# Altium PCB PCB.PcbDoc (part 3 of 6)
Units mm, origin at the board's own origin, x right, y up, seen from the top; angles counter-clockwise.
Board outline 190 x 64 mm, 6 copper layers (SIG 1, GND 1, SIG 2, PWR, GND 2, SIG 3), stack 1.565 mm thick; 489 components, 387 nets, 1828 pads, 1817 vias.
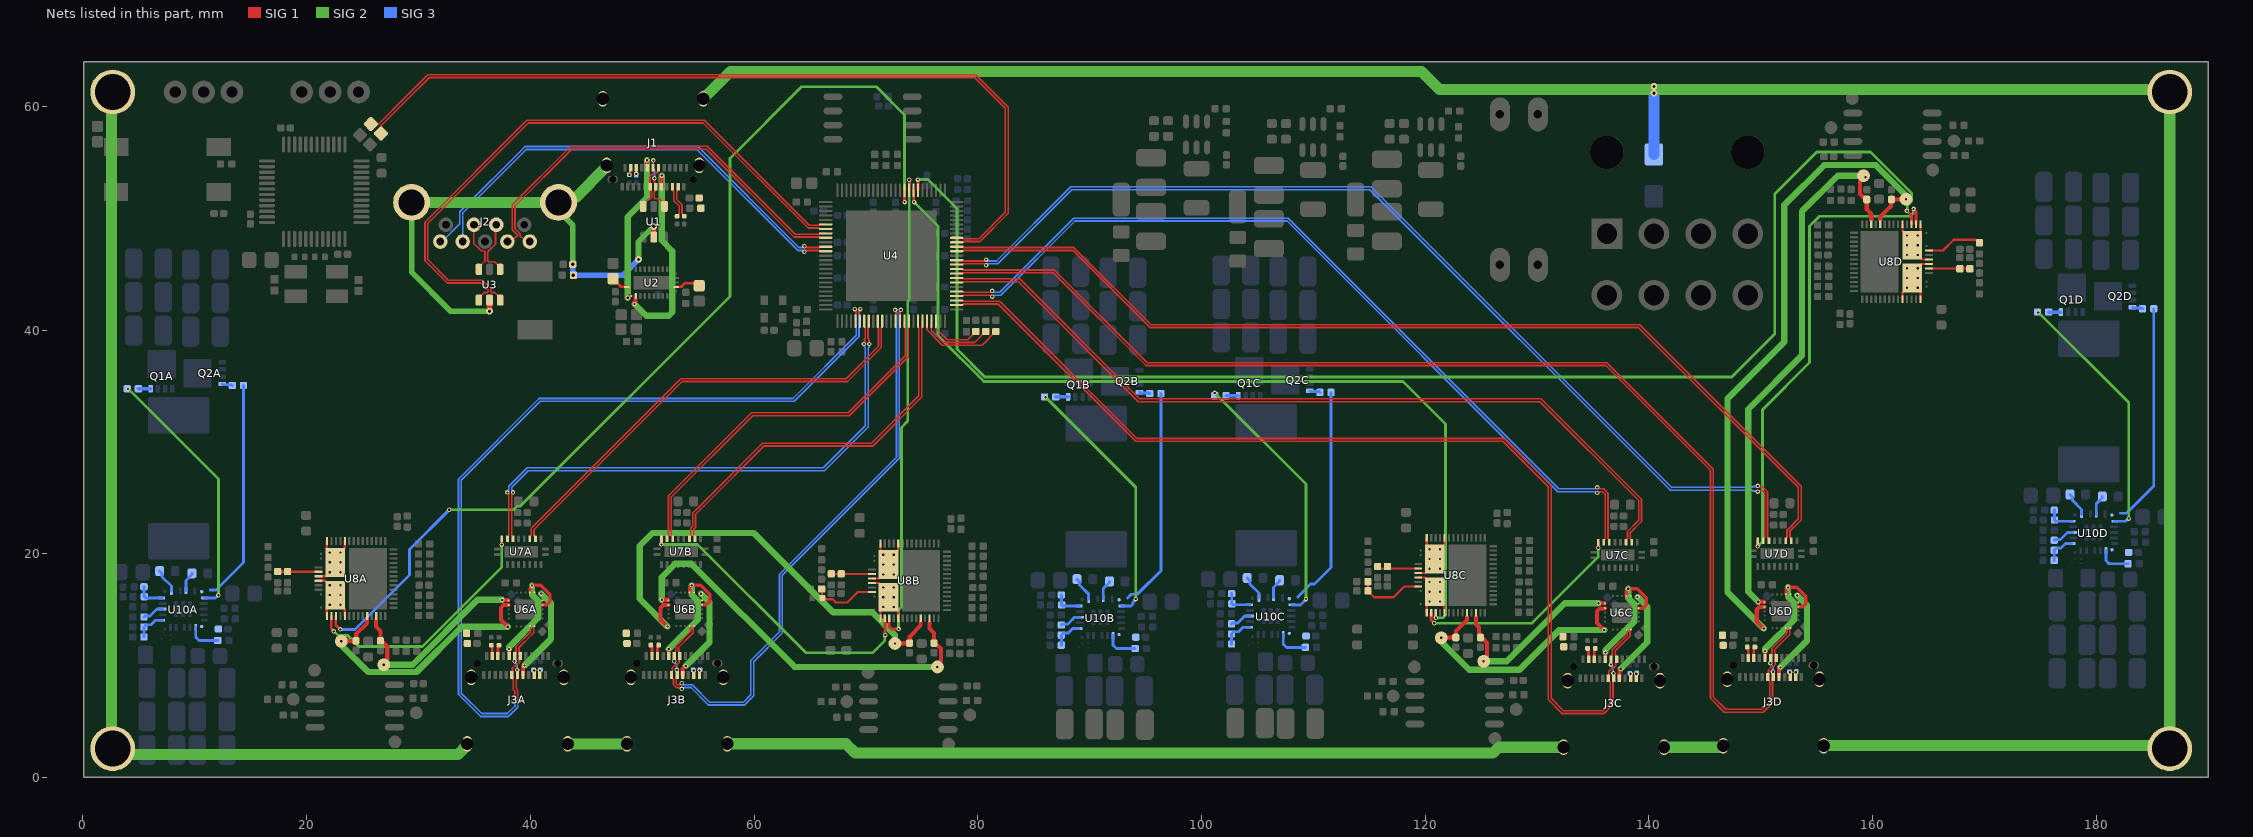
[diagram p7: the nets of this part, all layers, seen from the top]

## Via types
v1: diameter 0.4, hole 0.2, SIG 1 to SIG 3, tented both sides, 1364 vias
v2: diameter 0.6, hole 0.3, SIG 1 to SIG 3, tented both sides, 196 vias
v3: diameter 0.5, hole 0.2, SIG 1 to SIG 3, 130 vias
v4: diameter 0.8, hole 0.45, SIG 1 to SIG 3, tented both sides, 102 vias
v5: diameter 0.5, hole 0.25, SIG 1 to SIG 3, tented both sides, 14 vias
v6: diameter 0.5, hole 0.3, SIG 1 to SIG 3, tented both sides, 5 vias
v7: diameter 0.55, hole 0.3, SIG 1 to SIG 3, tented both sides, 4 vias
v8: diameter 0.55, hole 0.35, SIG 1 to SIG 3, tented both sides, 2 vias

## Nets (pads, with @x,y where several pads share a name; then routed paths per layer and width w, separated by ;. In a path a pad name is that pad's centre, name@x,y a point inside that pad or via, vN(x,y) a via of type N, cw(c..) or ccw(c..) an arc to the next point about the centre after c; other vN are vias at no path point)
AD_N: J2.2 U3.4 | length 5.1
  SIG 1 w0.152: J2.2@36.95,49.435 36.881,49.366 36.881,47.698 36.204,47.021 36.204,46.215 36.293,46.126 36.824,46.126 37.3,45.65 U3.4@37.3,45.45
AD_P: J2.3 U3.6 | length 4.8
  SIG 1 w0.152: J2.3@34.95,49.435 34.95,47.767 35.608,47.109 35.852,47.109 35.95,47.011 35.95,46.2 35.4,45.65 U3.6@35.4,45.45
ADCIN1A: R49A.2 R50A.1 U8A.6 | length 3.7
  SIG 1 w0.203: R49A.2@17.405,18.425 17.428,18.402 21.066,18.402 U8A.6@21.067,18.4
ADCIN1B: R49B.2 R50B.1 U8B.6 | length 3.7
  SIG 1 w0.203: R49B.2@66.905,18.225 66.928,18.202 70.566,18.202 U8B.6@70.567,18.2
ADCIN1C: R49C.2 R50C.1 U8C.6 | length 3.7
  SIG 1 w0.203: R49C.2@115.738,18.725 115.761,18.702 119.398,18.702 U8C.6@119.4,18.7
ADCIN1D: R49D.2 R50D.1 U8D.6 | length 3.7
  SIG 1 w0.203: U8D.6@165.05,45.525 165.052,45.523 168.689,45.523 R49D.2@168.712,45.5
ADCIN2B: R9.1 R10.2 U8B.10 | length 5.8
  SIG 1 w0.2: R10.2@66.045,16.875 66.082,16.837 66.082,16.113 R9.1@66.12,16.075 66.24,15.955 67.036,15.955 67.329,15.662 68.346,15.662 69.284,16.6 U8B.10@70.55,16.6
ADCIN2C: R11.1 R12.2 U8C.10 | length 6
  SIG 1 w0.2: R12.2@114.895,17.525 R11.1@114.895,16.7 115.458,16.137 117.182,16.137 118.145,17.1 U8C.10@119.4,17.1
ADCIN2D: R13.1 U8D.10 | length 5.1
  SIG 1 w0.2: U8D.10@165.05,47.125 166.305,47.125 167.268,48.088 169.237,48.088 R13.1@169.575,47.75
BOOT1A: C60A.1 U10A.22 | length 1.8
  SIG 3 w0.254: U10A.22@9.201,16.722 9.201,17.633 9.751,18.183 C60A.1@9.751,18.272
BOOT1B: C60B.1 U10B.22 | length 1.8
  SIG 3 w0.254: U10B.22@91.231,15.993 91.231,16.903 91.781,17.453 C60B.1@91.781,17.543
BOOT1C: C60C.1 U10C.22 | length 1.8
  SIG 3 w0.254: U10C.22@106.45,16.1 106.45,17.01 107,17.56 C60C.1@107,17.65
BOOT1D: C60D.1 U10D.22 | length 1.8
  SIG 3 w0.254: U10D.22@180.011,23.578 180.011,24.488 180.561,25.038 C60D.1@180.561,25.128
BOOT2A: C61A.1 U10A.20 | length 2.2
  SIG 3 w0.254: C61A.1@6.851,18.472 7.079,18.245 7.079,17.945 7.899,17.124 7.899,16.687 U10A.20@7.901,16.685
BOOT2B: C61B.1 U10B.20 | length 2.2
  SIG 3 w0.254: C61B.1@88.881,17.743 89.109,17.515 89.109,17.215 89.929,16.395 89.929,15.957 U10B.20@89.931,15.955
BOOT2C: C61C.1 U10C.20 | length 2.2
  SIG 3 w0.254: C61C.1@104.1,17.85 104.328,17.622 104.328,17.322 105.148,16.502 105.148,16.064 U10C.20@105.15,16.063
BOOT2D: C61D.1 U10D.20 | length 2.2
  SIG 3 w0.254: C61D.1@177.661,25.328 177.889,25.1 177.889,24.8 178.709,23.98 178.709,23.542 U10D.20@178.711,23.54
C_CC1A: J3A.A5 U6A.4 U6A.7 | length 11.7
  SIG 1 w0.25: v1(38.1,11.495) J3A.A5@38.1,10.875 38.1,10.847 J3A.A5@38.107,10.84
  SIG 1 w0.3: U6A.7@39.972,16.554 39.972,16.975 40.148,17.151 v1(40.148,17.178) ; v1@40.15,17.175 40.169,17.194 40.942,17.194 41.755,16.381 41.755,15.732 41.467,15.444 U6A.4@41.072,15.444
  SIG 2 w0.563: v1(38.1,11.495) 38.1,11.679 40.704,14.282 40.704,15.806 40.148,16.361 v1(40.148,17.178)
C_CC1B: J3B.A5 U6B.4 U6B.7 | length 11.7
  SIG 1 w0.25: J3B.A5@52.375,10.855 J3B.A5@52.382,10.849 ; J3B.A5@52.375,10.883 v1(52.375,11.503)
  SIG 1 w0.3: U6B.7@54.247,16.563 54.247,16.983 54.423,17.159 v1(54.423,17.186) ; v1@54.425,17.183 54.444,17.202 55.217,17.202 56.03,16.389 56.03,15.741 55.742,15.452 U6B.4@55.347,15.452
  SIG 2 w0.563: v1(52.375,11.503) 54.979,14.107 54.979,15.814 54.423,16.37 v1(54.423,17.186)
C_CC1C: J3C.A5 U6C.4 U6C.7 | length 11.7
  SIG 1 w0.25: v1(136.13,11.201) J3C.A5@136.13,10.58 136.13,10.553 J3C.A5@136.137,10.546
  SIG 1 w0.3: U6C.7@138.002,16.26 138.002,16.68 138.179,16.856 v1(138.179,16.883) ; v1@138.18,16.88 138.199,16.899 138.973,16.899 139.786,16.086 139.786,15.438 139.497,15.149 U6C.4@139.102,15.149
  SIG 2 w0.563: v1(136.13,11.201) 136.13,11.384 138.734,13.988 138.734,15.511 138.179,16.067 v1(138.179,16.883)
C_CC1D: J3D.A5 U6D.4 U6D.7 | length 11.7
  SIG 1 w0.25: v1(150.4,11.328) J3D.A5@150.4,10.708 150.4,10.68 J3D.A5@150.407,10.674
  SIG 1 w0.3: U6D.7@152.272,16.388 152.272,16.808 152.448,16.984 v1(152.448,17.011) ; v1@152.45,17.008 152.469,17.027 153.242,17.027 154.055,16.214 154.055,15.566 153.767,15.277 U6D.4@153.372,15.277
  SIG 2 w0.563: v1(150.4,11.328) 150.4,11.512 153.004,14.116 153.004,15.639 152.448,16.195 v1(152.448,17.011)
C_CC2A: J3A.B5 U6A.5 U6A.6 | length 8.7
  SIG 1 w0.367: J3A.B5@39.35,9.175 39.35,9.891 39.475,10.016 v1(39.475,10.025)
  SIG 2 w0.563: v1(39.475,10.025) 41.85,12.4 41.85,15.584 v1(40.979,16.454)
C_CC2B: J3B.B5 U6B.5 U6B.6 | length 8.6
  SIG 1 w0.367: J3B.B5@53.625,9.183 53.625,9.712 53.887,9.974 v1(53.887,9.983)
  SIG 2 w0.563: v1(53.887,9.983) 56.019,12.115 56.019,15.698 v1(55.266,16.451)
C_CC2C: J3C.B5 U6C.5 U6C.6 | length 8.7
  SIG 1 w0.367: J3C.B5@137.38,8.88 137.38,9.597 137.505,9.722 v1(137.505,9.73)
  SIG 2 w0.563: v1(137.505,9.73) 139.88,12.105 139.88,15.289 v1(139.01,16.16)
C_CC2D: J3D.B5 U6D.5 U6D.6 | length 8.7
  SIG 1 w0.367: J3D.B5@151.65,9.008 151.65,9.724 151.775,9.849 v1(151.775,9.858)
  SIG 2 w0.563: v1(151.775,9.858) 154.15,12.233 154.15,15.417 v1(153.279,16.287)
C_USB2_N: J1.A7 J1.B7 U1.6 | length 4.4
  SIG 1 w0.152: U1.6@50.089,51.08 50.089,51.28 50.565,51.756 50.747,51.756 50.836,51.845 50.836,52.387 50.787,52.436 50.787,52.759 50.693,52.853 50.693,53.768 50.931,54.007 51.223,54.007 51.389,54.173 51.389,54.459 J1.B7@51.463,54.533
C_USB2_P: J1.A6 J1.B6 U1.4 | length 5.5
  SIG 1 w0.152: J1.B6@50.963,54.533 50.985,54.555 50.985,55.168 v1(51.006,55.19) ; v1(51.1,53.6) 51.1,53.155 51.213,53.042 J1.A6@51.213,52.833 51.139,52.759 51.139,52.436 51.09,52.387 51.09,51.845 51.179,51.756 51.513,51.756 51.989,51.28 U1.4@51.989,51.08
  SIG 3 w0.152: v1(51.006,55.19) 50.981,55.164 50.981,54.431 51.1,54.312 v1(51.1,53.6)
C_USB3_TX1_N: C4.2 J1.A3 | length 3
  SIG 1 w0.152: J1.A3@52.713,52.833 52.787,52.759 52.787,52.436 52.836,52.387 52.836,51.587 53.312,51.111 53.312,50.413 53.122,50.223 C4.2@53.122,50.207
C_USB3_TX1_P: C3.2 J1.A2 | length 3
  SIG 1 w0.152: J1.A2@53.213,52.833 53.139,52.759 53.139,52.436 53.09,52.387 53.09,51.692 53.427,51.356 53.566,51.216 53.566,50.413 53.757,50.223 C3.2@53.757,50.207
C_USB3_TX1A_N: C35A.1 J3A.A3 | length 1
  SIG 1 w0.254: J3A.A3@37.1,10.875 37.1,11.75 C35A.1@37.2,11.85
C_USB3_TX1A_P: C34A.1 J3A.A2 | length 1
  SIG 1 w0.254: C34A.1@36.5,11.85 36.6,11.75 J3A.A2@36.6,10.875
C_USB3_TX1B_N: C35B.1 J3B.A3 | length 1
  SIG 1 w0.254: J3B.A3@51.375,10.883 51.375,11.758 C35B.1@51.475,11.858
C_USB3_TX1B_P: C34B.1 J3B.A2 | length 1
  SIG 1 w0.254: C34B.1@50.775,11.858 50.875,11.758 J3B.A2@50.875,10.883
C_USB3_TX1C_N: C35C.1 J3C.A3 | length 1
  SIG 1 w0.254: J3C.A3@135.13,10.58 135.13,11.455 C35C.1@135.23,11.555
C_USB3_TX1C_P: C34C.1 J3C.A2 | length 1
  SIG 1 w0.254: C34C.1@134.53,11.555 134.63,11.455 J3C.A2@134.63,10.58
C_USB3_TX1D_N: C35D.1 J3D.A3 | length 1
  SIG 1 w0.254: J3D.A3@149.4,10.708 149.4,11.583 C35D.1@149.5,11.683
C_USB3_TX1D_P: C34D.1 J3D.A2 | length 1
  SIG 1 w0.254: C34D.1@148.8,11.683 148.9,11.583 J3D.A2@148.9,10.708
C_USB3_TX2_N: C6.2 J1.B3 | length 0.6
  SIG 1 w0.152: J1.B3@49.463,54.533 49.464,54.532 49.464,53.982 v1(49.466,53.98)
C_USB3_TX2_P: C5.2 J1.B2 | length 0.7
  SIG 1 w0.152: v1(48.855,53.902) 48.903,53.949 48.903,54.473 J1.B2@48.963,54.533
C_USB3_TX2A_N: C37A.1 J3A.B3
  other v1: 40.345,9.583
C_USB3_TX2A_P: C36A.1 J3A.B2
  other v1: 40.855,9.583
C_USB3_TX2B_N: C37B.1 J3B.B3
  other v1: 54.62,9.591
C_USB3_TX2B_P: C36B.1 J3B.B2
  other v1: 55.13,9.591
C_USB3_TX2C_N: C37C.1 J3C.B3
  other v1: 138.375,9.288
C_USB3_TX2C_P: C36C.1 J3C.B2
  other v1: 138.885,9.288
C_USB3_TX2D_N: C37D.1 J3D.B3
  other v1: 152.645,9.416
C_USB3_TX2D_P: C36D.1 J3D.B2
  other v1: 153.155,9.416
CC1: J1.A5 U2.2 | length 18.2
  SIG 1 w0.367: v1(49.325,42.345) 49.325,42.325 49.3,42.3 49.3,42.49 49.42,42.61 49.42,42.8 ; J1.A5@51.713,52.833 51.713,53.793 51.741,53.821 v1(51.741,53.83)
  SIG 2 w0.563: v1(49.325,42.345) 50.369,41.3 52.37,41.3 52.7,41.63 52.7,47.085 51.741,48.045 v1(51.741,53.83)
CC1A: C49A.1 TP1A.0 U6A.12 U8A.24 | length 24.2
  SIG 1 w0.367: v1(23.1,12.2) 23.115,12.215 24.385,12.215 C49A.1@24.4,12.23 24.429,12.259 24.429,12.829 25.4,13.8 25.4,14.05 ; v1(37.987,13.5) 37.978,13.5 37.668,13.81 37.663,13.81 37.362,14.111 37.362,15.177 37.613,15.428 U6A.12@38.062,15.428
  SIG 2 w0.563: v1(23.1,12.2) 23.1,11.847 25.502,9.445 29.82,9.445 33.875,13.5 v1(37.987,13.5)
CC1B: C49B.1 TP1B.0 U6B.12 U8B.24 | length 42.4
  SIG 1 w0.367: v1(52.262,13.508) 52.253,13.508 51.943,13.818 51.938,13.818 51.637,14.119 51.637,15.185 51.888,15.436 U6B.12@52.337,15.436 ; v1(72.6,12) 72.615,12.015 73.885,12.015 C49B.1@73.9,12.03 73.929,12.059 73.929,12.629 74.9,13.6 74.9,13.85
  SIG 2 w0.563: v1(52.262,13.508) 49.787,15.983 49.787,20.733 50.937,21.883 59.95,21.883 67.058,14.775 70.575,14.775 72.6,12.75 v1(72.6,12)
CC1C: C49C.1 TP1C.0 U6C.12 U8C.24 | length 23.7
  SIG 1 w0.367: v1(121.45,12.5) 121.465,12.515 122.735,12.515 C49C.1@122.75,12.53 122.779,12.559 122.779,13.129 123.75,14.1 123.75,14.35 ; v1(136.018,13.205) 136.009,13.205 135.699,13.515 135.694,13.515 135.393,13.817 135.393,14.882 135.644,15.133 U6C.12@136.092,15.133
  SIG 2 w0.563: v1(121.45,12.5) 121.45,12.147 123.947,9.65 128.45,9.65 132.005,13.205 v1(136.018,13.205)
CC1D: C49D.1 TP1D.0 U6D.12 U8D.24 | length 61.4
  SIG 1 w0.367: v1(150.287,13.333) 150.278,13.333 149.968,13.643 149.963,13.643 149.662,13.944 149.662,15.01 149.913,15.261 U6D.12@150.362,15.261 ; 160.7,49.875 160.7,50.125 161.671,51.096 161.671,51.666 C49D.1@161.7,51.695 161.715,51.71 162.985,51.71 v1(163,51.725)
  SIG 2 w0.563: v1(150.287,13.333) 147.05,16.57 147.05,33.875 152.125,38.95 152.125,51.2 155.7,54.775 160.303,54.775 163,52.078 v1(163,51.725)
CC2: J1.B5 U2.1 | length 13.9
  SIG 1 w0.367: v1(48.7,42.9) 48.709,42.9 48.878,43.069 ; v1(50.425,55.195) 50.431,55.189 50.431,54.565 J1.B5@50.463,54.533
  SIG 2 w0.563: v1(48.7,42.9) 48.7,50.137 50.425,51.862 v1(50.425,55.195)
CC2A: C50A.1 TP2A.0 U6A.11 U8A.26 | length 17.7
  SIG 1 w0.367: 26.2,14.075 26.2,13.521 26.6,13.121 C50A.1@26.6,12.23 ; C50A.1@26.736,12.074 26.864,12.074 27.204,11.734 27.204,10.614 TP2A.0@26.885,10.295 ; v1(37.487,15.895) 37.489,15.897 U6A.11@38.008,15.897
  SIG 2 w0.563: v1(26.885,10.099) 29.474,10.099 35.272,15.897 37.484,15.897 v1(37.487,15.895)
CC2B: C50B.1 TP2B.0 U6B.11 U8B.26 | length 35.7
  SIG 1 w0.367: v1(51.762,15.903) 51.764,15.905 U6B.11@52.283,15.905 ; 75.7,13.85 75.7,13.321 76.1,12.921 C50B.1@76.1,12.03 ; C50B.1@76.236,11.874 76.364,11.874 76.704,11.534 76.704,10.414 TP2B.0@76.385,10.095
  SIG 2 w0.563: v1(51.762,15.903) 51.762,17.929 52.965,19.133 54.392,19.133 63.626,9.899 v1(76.385,9.899)
CC2C: C50C.1 TP2C.0 U6C.11 U8C.26 | length 17.3
  SIG 1 w0.367: 124.55,14.375 124.55,13.685 124.814,13.421 124.814,12.666 C50C.1@124.95,12.53 ; C50C.1@125.086,12.374 125.214,12.374 125.554,12.034 125.554,10.914 125.25,10.61 TP2C.0@125.25,10.4 TP2C.0@125.25,10.4 ; v1(135.517,15.6) 135.52,15.603 U6C.11@136.039,15.603
  SIG 2 w0.563: v1(125.235,10.399) 127.299,10.399 132.5,15.6 v1(135.517,15.6)
CC2D: C50D.1 TP2D.0 U6D.11 U8D.26 | length 49
  SIG 1 w0.367: v1(149.787,15.728) 149.789,15.73 U6D.11@150.308,15.73 ; TP2D.0@159.215,53.63 158.896,53.311 158.896,52.191 159.236,51.851 C50D.1@159.364,51.851 ; C50D.1@159.5,51.695 159.5,50.804 159.9,50.404 159.9,49.875
  SIG 2 w0.563: v1(149.787,15.728) 148.9,16.614 148.9,32.95 153.7,37.75 153.7,50.62 156.906,53.826 159.225,53.826 v1(159.375,53.676)
CDCA: R66A.1 U10A.16 | length 2
  SIG 3 w0.254: R66A.1@5.451,14.372 5.517,14.438 6,14.438 6.632,15.07 7.112,15.07 U10A.16@7.114,15.072
CDCB: R66B.1 U10B.16 | length 2
  SIG 3 w0.254: R66B.1@87.481,13.643 87.547,13.708 88.03,13.708 88.662,14.341 89.142,14.341 U10B.16@89.144,14.343
CDCC: R66C.1 U10C.16 | length 2
  SIG 3 w0.254: R66C.1@102.7,13.75 102.766,13.816 103.249,13.816 103.881,14.448 104.361,14.448 U10C.16@104.363,14.45
CDCD: R66D.1 U10D.16 | length 2
  SIG 3 w0.254: R66D.1@176.261,21.228 176.327,21.293 176.81,21.293 177.442,21.926 177.922,21.926 U10D.16@177.924,21.928
CFG_BC_EN: R33.1 U4.22 | length 6.5
  SIG 1 w0.15: U4.22@75.862,40.818 75.862,39.988 76.935,38.915 79.74,38.915 R33.1@80.725,39.9
CFG_NON_REM: R32.1 U4.21 | length 8
  SIG 1 w0.152: U4.21@75.462,40.818 75.47,40.81 75.47,40.039 76.835,38.674 80.399,38.674 R32.1@81.625,39.9
CFG_STRAP3: R34.1 U4.23 | length 5
  SIG 1 w0.152: U4.23@76.262,40.818 76.27,40.81 76.27,40.164 77.275,39.159 79.116,39.159 79.501,39.544 79.501,39.562 79.827,39.887 R34.1@79.827,39.9
CHASSIS: C7.2 C8.1 C38A.2 C38B.2 C38C.2 C38D.2 D1.2 J1.1 J1.2 J1.3 J1.4 J2.Shell J3A.1 J3A.2 J3A.3 J3A.4 J3B.1 J3B.2 J3B.3 J3B.4 J3C.1 J3C.2 J3C.3 J3C.4 J3D.1 J3D.2 J3D.3 J3D.4 pad.20 R7.1 R14.2 R36A.1 R36B.1 R36C.1 R36D.1 U1.2 U3.2 | length 457.3
  SIG 1 w0.5: v2(36.35,41.7) U3.2@36.35,42.7 ; v2(51.025,49.275) 51.032,49.268 51.032,48.337 U1.2@51.039,48.33
  SIG 2 w0.5: J2.Shell@29.38,51.435 29.38,45.195 32.875,41.7 v2(36.35,41.7) ; J2.Shell@42.52,51.435 42.52,50.677 43.805,49.392 v2(43.805,45.9) ; v2(49.675,46.325) 49.675,47.925 v2(51.025,49.275)
  SIG 2 w1: pad.20@2.673,61.325 pad.20@2.652,61.304 2.551,61.203 2.551,2.696 3.173,2.075 33.52,2.075 34.36,2.915 J3A.3@34.36,3.015 ; J2.Shell@29.38,51.435 J2.Shell@42.52,51.435 42.96,51.875 44.065,51.875 J1.2@46.733,54.543 ; J3A.4@43.34,3.015 43.344,3.019 48.631,3.019 J3B.3@48.635,3.023 ; J1.3@55.553,60.893 55.653,60.993 55.753,60.993 57.89,63.13 119.688,63.13 121.292,61.525 186.192,61.525 186.588,61.129 186.588,2.923 186.551,2.885 155.677,2.885 J3D.4@155.64,2.848 ; J3B.4@57.615,3.023 68.231,3.023 69.054,2.2 126.081,2.2 126.602,2.72 J3C.3@132.39,2.72 ; J3C.4@141.37,2.72 146.56,2.72 146.66,2.82 J3D.3@146.66,2.848
  SIG 3 w0.5: v2(43.805,45.9) 43.805,44.997 43.85,44.952 v2(43.85,44.925) 48.275,44.925 v2(49.675,46.325)
  SIG 3 w1: D1.2@140.462,55.723 140.462,61.587 v2@140.475,61.6
  other v2: 140.475,61.2 140.475,61.8
COMPA: C70A.1 R65A.1 U10A.18 | length 2.5
  SIG 3 w0.254: C70A.1@5.451,17.072 5.466,17.058 5.466,16.187 R65A.1@5.48,16.172 5.578,16.074 7.049,16.074 U10A.18@7.051,16.072
COMPB: C70B.1 R65B.1 U10B.18 | length 2.5
  SIG 3 w0.254: C70B.1@87.481,16.343 87.495,16.329 87.495,15.457 R65B.1@87.51,15.443 87.608,15.345 89.079,15.345 U10B.18@89.081,15.343
COMPC: C70C.1 R65C.1 U10C.18 | length 2.5
  SIG 3 w0.254: C70C.1@102.7,16.45 102.714,16.436 102.714,15.564 R65C.1@102.728,15.55 102.826,15.452 104.298,15.452 U10C.18@104.3,15.45
COMPD: C70D.1 R65D.1 U10D.18 | length 2.5
  SIG 3 w0.254: C70D.1@176.261,23.928 176.276,23.914 176.276,23.042 R65D.1@176.29,23.028 176.388,22.93 177.859,22.93 U10D.18@177.861,22.928
DIRA: U7A.9 U8A.16 | length 22.5
  SIG 1 w0.25: U8A.16@22.2,14.45 22.2,13.331 22.416,13.115 v1(22.416,13.074) ; v1(37.45,20.841) U7A.9@37.45,21.35
  SIG 2 w0.25: v1(22.416,13.074) 22.457,13.074 22.834,12.697 23.674,12.697 24.637,11.734 30.359,11.734 37.45,18.825 v1(37.45,20.841)
DIRB: U7B.9 U8B.16 | length 27
  SIG 1 w0.25: v1(51.725,20.849) U7B.9@51.725,21.358 ; U8B.16@71.7,14.25 71.713,14.237 71.713,12.762 v1(71.725,12.75)
  SIG 2 w0.25: v1(51.725,20.849) 54.951,20.849 64.625,11.175 70.625,11.175 71.696,12.246 71.696,12.721 v1(71.725,12.75)
DIRC: U7C.9 U8C.16 | length 19.5
  SIG 1 w0.25: U8C.16@120.55,14.75 120.546,14.746 120.546,14.115 120.826,13.835 v1(120.826,13.812) ; v1(135.48,20.547) U7C.9@135.48,21.055
  SIG 2 w0.25: v1(120.826,13.812) 129.562,13.812 135.48,19.73 v1(135.48,20.547)
DIRD: U7D.9 U8D.16 | length 42.7
  SIG 1 w0.25: v1(149.75,20.674) U7D.9@149.75,21.183 ; v1(163.684,50.851) 163.684,50.81 163.9,50.594 U8D.16@163.9,49.475
  SIG 2 w0.25: v1(149.75,20.674) 150.175,21.099 150.175,32.9 154.386,37.111 154.386,49.323 155.263,50.2 163.375,50.2 163.525,50.35 163.525,50.355 163.655,50.485 163.655,50.822 v1(163.684,50.851)
DITHA: C71A.1 U10A.7
DITHB: C71B.1 U10B.7
DITHC: C71C.1 U10C.7
DITHD: C71D.1 U10D.7
DP1_USB2_N: J3A.A7 J3A.B7 U4.6 U6A.20 | length 77.3
  SIG 1 w0.152: 38.623,7.065 38.623,7.714 38.473,7.864 38.473,8.729 38.424,8.778 38.424,9.101 J3A.B7@38.35,9.175 38.409,9.234 38.409,9.797 38.636,10.024 38.761,10.024 39.026,10.289 39.026,10.801 J3A.A7@39.1,10.875 39.026,10.949 39.026,11.272 38.977,11.321 38.977,11.627 40.15,12.8 40.299,12.949 40.299,13.464 40.372,13.537 U6A.20@40.372,13.544 ; 69.389,41.71 69.389,41.41 69.462,41.337 U4.6@69.462,40.818
  SIG 3 w0.152: v1(38.5,6.875) 38.5,6.808 38.623,6.685 38.623,6.403 37.949,5.73 35.645,5.73 33.825,7.55 33.825,26.587 40.884,33.646 63.596,33.646 63.745,33.795 69.24,39.29 69.389,39.439 69.389,41.71 69.512,41.833 v1(69.512,41.9)
DP1_USB2_P: J3A.A6 J3A.B6 U4.5 U6A.19 | length 77.3
  SIG 1 w0.152: J3A.A6@38.6,10.875 38.674,10.949 38.674,11.272 38.723,11.321 38.723,11.732 40.045,13.054 40.045,13.464 39.972,13.537 U6A.19@39.972,13.544 ; v1(38.812,9.625) 38.831,9.606 J3A.B6@38.831,9.248 ; J3A.B6@38.85,9.175 38.776,9.101 38.776,8.778 38.727,8.729 38.727,7.97 38.877,7.82 38.877,7.065 ; U4.5@69.062,40.818 69.062,41.337 69.135,41.41 69.135,41.71
  SIG 3 w0.152: v1(38.587,10.4) 38.587,10.333 38.812,10.108 v1(38.812,9.625) ; v1(39,6.875) 39,6.808 38.877,6.685 38.877,6.298 38.055,5.476 35.54,5.476 33.571,7.445 33.571,26.692 40.779,33.9 63.491,33.9 69.135,39.544 69.135,41.71 69.012,41.833 v1(69.012,41.9)
DP1_USB3_RX_N: U4.10 U7A.4 | length 41.1
  SIG 1 w0.152: U7A.4@39.95,21.35 39.95,21.525 40.073,21.648 40.073,22.273 40.222,22.422 53.326,35.526 53.475,35.675 68.25,35.675 71.135,38.56 71.135,40.225 71.062,40.298 U4.10@71.062,40.818
DP1_USB3_RX_P: U4.11 U7A.3 | length 41.1
  SIG 1 w0.152: U7A.3@40.45,21.35 40.45,21.525 40.327,21.648 40.327,22.168 53.58,35.421 68.355,35.421 71.389,38.455 71.389,40.225 71.462,40.298 U4.11@71.462,40.818
DP1_USB3_TX_N: U4.7 U7A.8 | length 48.5
  SIG 1 w0.152: U7A.8@37.95,21.35 37.95,21.525 38.073,21.648 38.073,25.377 v1(37.95,25.5) ; v1(69.825,38.775) 69.872,38.822 69.872,39.194 69.935,39.257 69.935,40.225 69.862,40.298 U4.7@69.862,40.818
  SIG 3 w0.152: v1(37.95,25.5) 37.95,25.567 38.073,25.69 38.073,26.059 39.718,27.704 66.194,27.704 69.948,31.457 69.948,38.41 69.872,38.486 69.872,38.728 v1(69.825,38.775)
DP1_USB3_TX_P: U4.8 U7A.7 | length 48.5
  SIG 1 w0.152: U7A.7@38.45,21.35 38.45,21.525 38.327,21.648 38.327,25.377 v1(38.45,25.5) ; U4.8@70.262,40.818 70.262,40.298 70.189,40.225 70.189,39.28 70.278,39.191 70.278,38.822 v1(70.325,38.775)
  SIG 3 w0.152: v1(38.45,25.5) 38.45,25.567 38.327,25.69 38.327,25.954 39.823,27.45 66.3,27.45 70.202,31.352 70.202,38.41 70.278,38.486 70.278,38.728 v1(70.325,38.775)
DP2_USB2_N: J3B.A7 J3B.B7 U4.15 U6B.20 | length 55.4
  SIG 1 w0.152: 53.347,8.056 53.037,8.056 52.799,8.294 52.799,8.809 52.625,8.983 J3B.B7@52.625,9.183 52.684,9.242 52.684,9.805 52.911,10.032 53.036,10.032 53.301,10.297 53.301,10.809 J3B.A7@53.375,10.883 53.301,10.957 53.301,11.28 53.252,11.329 53.252,11.635 54.425,12.808 54.574,12.957 54.574,13.472 54.647,13.545 U6B.20@54.647,13.552 ; U4.15@73.062,40.818 73.062,41.775 v1(73.112,41.825)
  SIG 3 w0.152: v1(53.537,7.933) 53.604,7.933 53.727,8.056 54.36,8.056 55.916,6.5 59.159,6.5 59.308,6.649 59.975,7.316 59.975,10.375 62.529,12.929 62.529,18.086 72.989,28.546 72.989,41.635 73.112,41.758 v1(73.112,41.825)
DP2_USB2_P: J3B.A6 J3B.B6 U4.14 U6B.19 | length 53.7
  SIG 1 w0.152: J3B.A6@52.875,10.883 52.949,10.957 52.949,11.28 52.998,11.329 52.998,11.74 54.32,13.062 54.32,13.472 54.247,13.545 U6B.19@54.247,13.552 ; v1(53.087,9.633) 53.106,9.614 J3B.B6@53.106,9.257 ; J3B.B6@53.125,9.183 53.053,9.111 53.053,8.4 53.142,8.31 53.347,8.31 ; v1(72.612,41.825) 72.662,41.775 U4.14@72.662,40.818
  SIG 3 w0.152: v1(52.862,10.408) 52.862,10.341 53.087,10.116 v1(53.087,9.633) ; v1(53.537,8.433) 53.604,8.433 53.727,8.31 54.465,8.31 56.021,6.754 59.054,6.754 59.721,7.421 59.721,10.48 62.275,13.034 62.275,18.191 72.735,28.651 72.735,41.635 72.612,41.758 v1(72.612,41.825)
DP2_USB3_RX_N: U4.19 U7B.4 | length 33.7
  SIG 1 w0.152: U7B.4@54.225,21.358 54.225,21.533 54.348,21.656 54.348,22.31 54.512,22.473 54.512,23.642 54.66,23.791 54.877,24.008 55.418,24.549 60.62,29.751 60.769,29.9 70.5,29.9 74.735,34.135 74.735,40.225 74.662,40.298 U4.19@74.662,40.818
DP2_USB3_RX_P: U4.20 U7B.3 | length 33.7
  SIG 1 w0.152: U7B.3@54.725,21.358 54.725,21.533 54.602,21.656 54.602,22.204 54.766,22.368 54.766,23.537 55.131,23.902 55.523,24.295 60.874,29.646 70.605,29.646 74.989,34.03 74.989,40.225 75.062,40.298 U4.20@75.062,40.818
DP2_USB3_TX_N: U4.16 U7B.8 | length 33.4
  SIG 1 w0.152: U7B.8@52.225,21.358 52.225,21.533 52.348,21.656 52.348,25.202 59.771,32.625 68.425,32.625 73.535,37.735 73.535,40.225 73.462,40.298 U4.16@73.462,40.818
DP2_USB3_TX_P: U4.17 U7B.7 | length 33.4
  SIG 1 w0.152: U7B.7@52.725,21.358 52.725,21.533 52.602,21.656 52.602,25.097 59.876,32.371 68.53,32.371 73.789,37.63 73.789,40.225 73.862,40.298 U4.17@73.862,40.818
DP3_USB2_N: J3C.A7 J3C.B7 U4.28 U6C.20 | length 92.7
  SIG 1 w0.152: U4.28@78.113,42.669 78.633,42.669 78.706,42.596 81.954,42.596 82.103,42.447 94.225,30.325 127.059,30.325 127.208,30.176 131.126,26.258 131.275,26.109 131.275,7.086 132.38,5.98 135.88,5.98 136.554,6.654 136.554,8.507 136.38,8.68 J3C.B7@136.38,8.88 136.439,8.939 136.439,9.502 136.666,9.729 136.791,9.729 137.057,9.995 137.057,10.507 J3C.A7@137.13,10.58 137.057,10.654 137.057,10.978 137.007,11.027 137.007,11.332 138.181,12.506 138.329,12.654 138.329,13.169 138.402,13.242 U6C.20@138.402,13.249
DP3_USB2_P: J3C.A6 J3C.B6 U4.27 U6C.19 | length 92.2
  SIG 1 w0.152: U4.27@78.113,42.269 78.633,42.269 78.706,42.342 81.849,42.342 94.12,30.071 126.954,30.071 131.021,26.004 131.021,7.315 ; 131.021,7.272 131.021,6.981 132.275,5.726 135.986,5.726 136.808,6.549 136.808,7.658 136.808,8.808 J3C.B6@136.88,8.88 ; J3C.A6@136.63,10.58 136.704,10.654 136.704,10.978 136.753,11.027 136.753,11.438 138.075,12.76 138.075,13.169 138.002,13.242 U6C.19@138.002,13.249 ; v1(136.843,9.33) 136.861,9.312 J3C.B6@136.861,8.954
  SIG 3 w0.152: v1(136.618,10.105) 136.618,10.038 136.843,9.813 v1(136.843,9.33)
DP3_USB3_RX_N: U4.32 U7C.4 | length 73.3
  SIG 1 w0.152: U4.32@78.113,44.269 78.633,44.269 78.706,44.342 83.649,44.342 94.37,33.621 130.27,33.621 139.105,24.785 139.105,23.009 138.103,22.007 138.103,21.353 137.98,21.23 U7C.4@137.98,21.055
DP3_USB3_RX_P: U4.33 U7C.3 | length 73.7
  SIG 1 w0.152: U4.33@78.113,44.669 78.633,44.669 78.706,44.596 83.754,44.596 94.475,33.875 130.375,33.875 139.359,24.891 139.359,22.904 138.357,21.902 138.357,21.353 138.48,21.23 U7C.3@138.48,21.055
DP3_USB3_TX_N: U4.29 U7C.8 | length 75.2
  SIG 1 w0.152: U4.29@78.113,43.069 78.633,43.069 78.706,43.142 81.177,43.142 v1(81.3,43.019) ; v1@135.55,25.575 135.861,25.575 136.103,25.332 136.103,21.353 135.98,21.23 U7C.8@135.98,21.055
  SIG 3 w0.152: v1(81.3,43.019) 81.367,43.019 81.49,43.142 82.067,43.142 88.696,49.771 107.67,49.771 131.866,25.575 135.21,25.575 135.333,25.452 v1(135.4,25.452)
DP3_USB3_TX_P: U4.30 U7C.7 | length 75.6
  SIG 1 w0.152: U4.30@78.113,43.469 78.633,43.469 78.706,43.396 81.177,43.396 v1(81.3,43.519) ; v1@135.55,25.829 135.966,25.829 136.357,25.438 136.357,21.353 136.48,21.23 U7C.7@136.48,21.055
  SIG 3 w0.152: v1(81.3,43.519) 81.367,43.519 81.49,43.396 81.962,43.396 88.591,50.025 107.775,50.025 131.971,25.829 135.21,25.829 135.333,25.952 v1(135.4,25.952)
DP4_USB2_N: J3D.A7 J3D.B7 U4.35 U6D.20 | length 108.9
  SIG 1 w0.152: U4.35@78.113,45.469 78.633,45.469 78.706,45.396 86.854,45.396 95.15,37.1 136.259,37.1 145.775,27.584 145.775,7.209 146.876,6.108 150.15,6.108 150.824,6.782 150.824,8.634 150.65,8.808 J3D.B7@150.65,9.008 150.709,9.067 150.709,9.63 150.936,9.857 151.061,9.857 151.326,10.122 151.326,10.634 J3D.A7@151.4,10.708 151.326,10.782 151.326,11.105 151.277,11.154 151.277,11.46 152.45,12.633 152.599,12.782 152.599,13.297 152.672,13.37 U6D.20@152.672,13.377
DP4_USB2_P: J3D.A6 J3D.B6 U4.34 U6D.19 | length 108.5
  SIG 1 w0.152: U4.34@78.113,45.069 78.633,45.069 78.706,45.142 86.749,45.142 95.045,36.846 136.154,36.846 145.521,27.479 145.521,7.104 146.771,5.854 150.255,5.854 151.078,6.677 151.078,8.936 J3D.B6@151.15,9.008 ; J3D.A6@150.9,10.708 150.974,10.782 150.974,11.105 151.023,11.154 151.023,11.565 152.345,12.887 152.345,13.297 152.272,13.37 U6D.19@152.272,13.377 ; v1(151.112,9.458) 151.131,9.439 J3D.B6@151.131,9.082
  SIG 3 w0.152: v1(150.887,10.233) 150.887,10.166 151.112,9.941 v1(151.112,9.458)
DP4_USB3_RX_N: U4.39 U7D.4 | length 89.3
  SIG 1 w0.152: U4.39@78.113,47.069 78.633,47.069 78.706,47.142 88.499,47.142 95.246,40.395 95.395,40.246 139.079,40.246 153.375,25.95 153.375,23.137 152.373,22.135 152.373,21.481 152.25,21.358 U7D.4@152.25,21.183
DP4_USB3_RX_P: U4.40 U7D.3 | length 89.7
  SIG 1 w0.152: U4.40@78.113,47.469 78.633,47.469 78.706,47.396 88.604,47.396 95.5,40.5 139.184,40.5 153.629,26.055 153.629,25.018 153.629,24.913 153.629,23.031 152.627,22.029 152.627,21.481 152.75,21.358 U7D.3@152.75,21.183
DP4_USB3_TX_N: U4.36 U7D.8 | length 90.6
  SIG 1 w0.152: U4.36@78.113,45.869 78.633,45.869 78.714,45.95 80.583,45.95 ; v1(149.75,25.58) 149.797,25.627 150.055,25.627 150.13,25.703 150.373,25.46 150.373,21.481 150.25,21.358 U7D.8@150.25,21.183
  SIG 3 w0.152: v1(80.75,45.825) 80.817,45.825 80.94,45.948 81.794,45.948 88.417,52.571 115.07,52.571 141.864,25.777 141.938,25.703 149.255,25.703 149.331,25.627 149.703,25.627 v1(149.75,25.58)
DP4_USB3_TX_P: U4.37 U7D.7 | length 91.2
  SIG 1 w0.152: U4.37@78.113,46.269 78.633,46.269 78.698,46.204 80.629,46.204 v1(80.75,46.325) ; v1(149.75,26.08) 149.797,26.032 150.16,26.032 150.627,25.565 150.627,21.481 150.75,21.358 U7D.7@150.75,21.183
  SIG 3 w0.152: v1(80.75,46.325) 80.817,46.325 80.94,46.202 81.689,46.202 88.312,52.825 115.175,52.825 142.043,25.957 149.255,25.957 149.331,26.032 149.703,26.032 v1(149.75,26.08)
DP5_USB2_N: U3.1 U4.81 | length 55.1
  SIG 1 w0.152: U3.1@35.4,42.7 35.4,42.9 35.876,43.376 36.145,43.376 36.235,43.465 36.235,43.592 35.601,44.225 32.57,44.225 30.575,46.22 30.575,49.659 39.559,58.643 39.708,58.792 55.549,58.792 64.945,49.396 65.818,49.396 65.891,49.469 U4.81@66.411,49.469
DP5_USB2_P: U3.3 U4.82 | length 54.7
  SIG 1 w0.152: U3.3@37.3,42.7 37.3,42.9 36.824,43.376 36.578,43.376 36.489,43.465 36.489,43.697 35.707,44.479 32.675,44.479 30.829,46.325 30.829,49.554 39.813,58.538 55.444,58.538 64.84,49.142 65.818,49.142 65.891,49.069 U4.82@66.411,49.069
DP5_USB3_RX_N: J2.5 U4.86 | length 42.5
  SIG 1 w0.152: v1(64.504,47.519) 64.627,47.396 65.818,47.396 65.891,47.469 U4.86@66.411,47.469
  SIG 3 w0.152: J2.5@31.95,47.935 32.118,47.935 33.696,49.513 33.696,50.598 39.523,56.425 55,56.425 64.029,47.396 64.314,47.396 64.437,47.519 v1(64.504,47.519)
DP5_USB3_RX_P: J2.6 U4.87 | length 41.1
  SIG 1 w0.152: v1(64.504,47.019) 64.627,47.142 65.818,47.142 65.891,47.069 U4.87@66.411,47.069
  SIG 3 w0.152: J2.6@33.95,47.935 33.95,50.25 ; 33.95,50.355 33.95,50.492 39.629,56.171 54.895,56.171 63.924,47.142 64.314,47.142 64.437,47.019 v1(64.504,47.019)
DP5_USB3_TX_N: J2.8 U4.83 | length 37.6
  SIG 1 w0.152: J2.8@37.95,47.935 38.261,47.935 38.644,48.319 38.734,48.319 38.823,48.408 38.823,48.534 38.37,48.988 38.37,51.22 38.519,51.369 43.451,56.301 43.6,56.45 55.826,56.45 63.68,48.596 65.818,48.596 65.891,48.669 U4.83@66.411,48.669
DP5_USB3_TX_P: J2.9 U4.84 | length 37.1
  SIG 1 w0.152: J2.9@39.95,47.935 39.639,47.935 39.256,48.319 39.166,48.319 39.077,48.408 39.077,48.64 38.624,49.093 38.624,51.115 43.705,56.196 55.721,56.196 63.575,48.342 65.818,48.342 65.891,48.269 U4.84@66.411,48.269
DP6_USB2_N: R79.1 U4.41 | length 75.2
  SIG 1 w0.152: R79.1@25.734,58.434 25.749,58.449 26.445,58.449 28.917,60.922 30.697,62.701 30.845,62.85 79.83,62.85 82.729,59.951 82.729,50.454 82.58,50.305 80.366,48.091 80.217,47.942 78.706,47.942 78.633,47.869 U4.41@78.113,47.869
DP6_USB2_P: R80.1 U4.42 | length 74.1
  SIG 1 w0.152: R80.1@26.634,57.584 26.649,57.599 26.649,58.295 29.023,60.668 30.951,62.596 79.725,62.596 82.475,59.846 82.475,50.559 80.112,48.196 78.706,48.196 78.633,48.269 U4.42@78.113,48.269
DR1HA: R57A.2 U10A.2 | length 23.1
  SIG 2 w0.25: v1@4.1,34.7 12.109,26.691 v1(12.109,16.305)
  SIG 3 w0.254: U10A.2@10.851,16.072 11.837,16.072 12.069,16.305 v1(12.109,16.305)
  other v1: 4.025,34.745
DR1HB: R57B.2 U10B.2 | length 23
  SIG 2 w0.25: v1@86.13,33.97 94.138,25.962 v1(94.138,15.965)
  SIG 3 w0.254: U10B.2@92.881,15.343 93.71,15.343 93.889,15.522 93.889,15.676 94.138,15.925 v1(94.138,15.965)
  other v1: 86.055,34.015
DR1HC: R57C.2 U10C.2 | length 23.3
  SIG 2 w0.25: v1(101.2,34.4) 109.357,26.243 v1(109.357,15.965)
  SIG 3 w0.254: U10C.2@108.1,15.45 108.856,15.45 109.357,15.951 v1(109.357,15.965)
DR1HD: R57D.2 U10D.2 | length 23.1
  SIG 2 w0.25: v1@174.91,41.555 182.919,33.547 v1(182.919,23.16)
  SIG 3 w0.254: U10D.2@181.661,22.928 182.647,22.928 182.879,23.16 v1(182.919,23.16)
  other v1: 174.835,41.6
DR1HGA: Q1A.4 R57A.1 | length 1.1
  SIG 3 w0.305: R57A.1@4.951,34.772 Q1A.4@6.051,34.772
DR1HGB: Q1B.4 R57B.1 | length 1.1
  SIG 3 w0.305: R57B.1@86.981,34.043 Q1B.4@88.081,34.043
DR1HGC: Q1C.4 R57C.1 | length 1.1
  SIG 3 w0.305: R57C.1@102.2,34.15 Q1C.4@103.3,34.15
DR1HGD: Q1D.4 R57D.1 | length 1.1
  SIG 3 w0.305: R57D.1@175.761,41.628 Q1D.4@176.861,41.628
DR1LA: R58A.2 U10A.1 | length 19.8
  SIG 3 w0.254: 11.372,16.787 11.905,16.787 14.351,19.233 R58A.2@14.351,35.072
DR1LB: R58B.2 U10B.1 | length 19.8
  SIG 3 w0.254: 93.402,16.058 93.736,16.392 94.269,16.392 96.381,18.504 R58B.2@96.381,34.343
DR1LC: R58C.2 U10C.1 | length 19.7
  SIG 3 w0.254: 108.621,16.165 109.762,17.306 110.109,17.306 111.6,18.797 R58C.2@111.6,34.45
DR1LD: R58D.2 U10D.1 | length 19.8
  SIG 3 w0.254: 182.182,23.643 182.715,23.643 185.161,26.089 R58D.2@185.161,41.928
DR1LGA: Q2A.4 R58A.1 | length 1
  SIG 3 w0.254: Q2A.4@12.446,35.197 12.509,35.135 13.289,35.135 R58A.1@13.351,35.072
DR1LGB: Q2B.4 R58B.1 | length 1
  SIG 3 w0.254: Q2B.4@94.476,34.468 94.539,34.405 95.319,34.405 R58B.1@95.381,34.343
DR1LGC: Q2C.4 R58C.1 | length 1
  SIG 3 w0.254: Q2C.4@109.695,34.575 109.758,34.512 110.538,34.512 R58C.1@110.6,34.45
DR1LGD: Q2D.4 R58D.1 | length 1
  SIG 3 w0.254: Q2D.4@183.256,42.053 183.319,41.99 184.099,41.99 R58D.1@184.161,41.928
DRAIN1A: U8A.8 U8A.15 U8A.19 U8A.58 | length 3.4
  SIG 1 w0.203: U8A.8@21.05,17.6 21.65,17.6 U8A.58@22.05,17.2 ; U8A.15@21.8,14.45 21.8,15.2 U8A.58@22.05,15.45 ; U8A.58@23,15.45 23.4,15.05 U8A.19@23.4,14.45
  other v3: 22.067,15.45 23.017,15.45 22.067,16.325 23.017,16.325 22.067,17.2 23.017,17.2
DRAIN1B: U8B.8 U8B.15 U8B.19 U8B.58 | length 3.4
  SIG 1 w0.203: U8B.8@70.55,17.4 71.15,17.4 v3(71.55,17) ; U8B.15@71.3,14.25 71.3,15 v3(71.55,15.25) ; v3(72.5,15.25) 72.9,14.85 U8B.19@72.9,14.25
  other v3: 71.55,16.125 72.5,16.125 72.5,17
DRAIN1C: U8C.8 U8C.15 U8C.19 U8C.58 | length 3.4
  SIG 1 w0.203: U8C.8@119.4,17.9 120,17.9 v3(120.4,17.5) ; U8C.15@120.15,14.75 120.15,15.5 v3(120.4,15.75) ; v3(121.35,15.75) 121.75,15.35 U8C.19@121.75,14.75
  other v3: 120.4,16.625 121.35,16.625 121.35,17.5
DRAIN1D: U8D.8 U8D.15 U8D.19 U8D.58 | length 3.4
  SIG 1 w0.203: U8D.19@162.7,49.475 162.7,48.875 v3(163.1,48.475) ; v3(164.05,46.725) 164.45,46.325 U8D.8@165.05,46.325 ; v3(164.05,48.475) 164.3,48.725 U8D.15@164.3,49.475
  other v3: 163.1,46.725 163.1,47.6 164.05,47.6
DRAIN2A: U8A.7 U8A.52 U8A.56 U8A.57 | length 3.5
  SIG 1 w0.203: U8A.7@21.05,18 21.7,18 22.05,18.35 U8A.57@22.05,18.375 ; U8A.56@21.8,21.15 21.8,20.375 U8A.57@22.05,20.125 ; U8A.57@23,20.125 23,20.15 23.398,20.548 23.398,21.148 U8A.52@23.4,21.15
  other v3: 22.067,18.375 23.017,18.375 22.067,19.25 23.017,19.25 22.067,20.125 23.017,20.125
DRAIN2B: U8B.7 U8B.52 U8B.56 U8B.57 | length 3.5
  SIG 1 w0.203: U8B.7@70.55,17.8 71.2,17.8 71.55,18.15 v3(71.55,18.175) ; U8B.56@71.3,20.95 71.3,20.175 v3(71.55,19.925) ; v3(72.5,19.925) 72.5,19.95 72.898,20.348 72.898,20.948 U8B.52@72.9,20.95
  other v3: 72.5,18.175 71.55,19.05 72.5,19.05
DRAIN2C: U8C.7 U8C.52 U8C.56 U8C.57 | length 3.5
  SIG 1 w0.203: U8C.7@119.4,18.3 120.05,18.3 120.4,18.65 v3(120.4,18.675) ; U8C.56@120.15,21.45 120.15,20.675 v3(120.4,20.425) ; v3(121.35,20.425) 121.35,20.45 121.748,20.848 121.748,21.448 U8C.52@121.75,21.45
  other v3: 121.35,18.675 120.4,19.55 121.35,19.55
DRAIN2D: U8D.7 U8D.52 U8D.56 U8D.57 | length 3.5
  SIG 1 w0.203: U8D.52@162.7,42.775 162.702,42.777 162.702,43.377 163.1,43.775 v3(163.1,43.8) ; v3(164.05,43.8) 164.3,43.55 U8D.56@164.3,42.775 ; v3(164.05,45.55) 164.05,45.575 164.4,45.925 U8D.7@165.05,45.925
  other v3: 163.1,44.675 164.05,44.675 163.1,45.55
EN_CC: R6.1 U2.29 | length 1.5
  SIG 1 w0.25: R6.1@47.4,44.615 48.121,43.894 48.611,43.894 U2.29@48.636,43.869
EN_MUX: R5.1 U2.12 | length 2.5
  SIG 1 w0.25: U2.12@53.036,43.869 53.061,43.894 53.492,43.894 53.798,44.2 R5.1@55.4,44.2
FAULTA: U4.60 U8A.17 | length 90.4
  SIG 1 w0.25: U8A.17@22.6,14.45 22.6,13.659 v1(23.009,13.25) ; v1(73.462,51.461) U4.60@73.462,52.52
  SIG 2 w0.25: v1(32.755,23.954) 38.514,23.954 38.834,24.275 39.096,24.275 57.85,43.029 57.85,55.375 64.25,61.775 70.95,61.775 73.462,59.263 v1(73.462,51.461)
  SIG 3 w0.25: v1(23.009,13.25) 24.325,13.25 29.2,18.125 29.2,20.407 32.75,23.957 v1@32.75,23.975
FAULTB: U4.59 U8B.17 | length 43.2
  SIG 1 w0.25: U8B.17@72.1,14.25 72.1,13.459 72.259,13.3 v1(72.925,13.3) ; U4.59@73.862,52.52 73.875,52.533 73.875,53.442 v1(73.887,53.454)
  SIG 2 w0.25: v1(72.925,13.3) 72.925,15.003 73.175,15.253 73.175,31.303 73.75,31.878 73.75,42.563 73.887,42.7 v1(73.887,53.454)
FAULTC: U4.58 U8C.17 | length 81.1
  SIG 1 w0.25: U4.58@74.262,52.52 74.287,52.495 74.287,51.486 v1(74.312,51.461) ; U8C.17@120.95,14.75 120.96,14.74 120.96,14.301 v1(120.971,14.291)
  SIG 2 w0.25: v1(74.312,51.461) 76.461,49.313 76.461,39.514 80.55,35.425 118.025,35.425 121.825,31.625 121.825,14.537 121.579,14.291 v1(120.971,14.291)
FAULTD: U4.57 U8D.17 | length 124.8
  SIG 1 w0.25: U4.57@74.662,52.52 v1(74.662,53.479) ; v1(163.091,50.675) 163.5,50.266 U8D.17@163.5,49.475
  SIG 2 w0.25: v1(74.662,53.479) 75.563,53.479 78.14,50.902 78.14,38.316 80.628,35.828 147.428,35.828 151.275,39.675 151.275,52.2 155.025,55.95 159.83,55.95 163.497,52.283 163.497,51.519 163.12,51.143 163.12,50.704 v1(163.091,50.675)
FBA: R61A.2 R62A.1 U10A.14 | length 2.7
  SIG 3 w0.254: R62A.1@5.451,12.572 R61A.2@5.451,13.472 5.649,13.67 6.071,13.67 6.473,14.072 U10A.14@7.051,14.072
FBB: R61B.2 R62B.1 U10B.14 | length 2.7
  SIG 3 w0.254: R62B.1@87.481,11.843 R61B.2@87.481,12.743 87.679,12.941 88.1,12.941 88.502,13.343 U10B.14@89.081,13.343
FBC: R61C.2 R62C.1 U10C.14 | length 2.7
  SIG 3 w0.254: R62C.1@102.7,11.95 R61C.2@102.7,12.85 102.898,13.048 103.319,13.048 103.721,13.45 U10C.14@104.3,13.45
FBD: R61D.2 R62D.1 U10D.14 | length 2.7
  SIG 3 w0.254: R62D.1@176.261,19.428 R61D.2@176.261,20.328 176.459,20.526 176.881,20.526 177.283,20.928 U10D.14@177.861,20.928
FSWA: R64A.1 U10A.8 | length 3
  SIG 3 w0.254: U10A.8@10.076,13.435 10.076,12.571 10.375,12.272 R64A.1@12.051,12.272
FSWB: R64B.1 U10B.8 | length 3
  SIG 3 w0.254: U10B.8@92.106,12.705 92.106,11.842 92.405,11.543 R64B.1@94.081,11.543
FSWC: R64C.1 U10C.8 | length 3
  SIG 3 w0.254: U10C.8@107.325,12.812 107.325,11.949 107.624,11.65 R64C.1@109.3,11.65
FSWD: R64D.1 U10D.8 | length 3
  SIG 3 w0.254: U10D.8@180.886,20.29 180.886,19.427 181.185,19.128 R64D.1@182.861,19.128